# EAGLE board untitled (EAGLE 6.3)
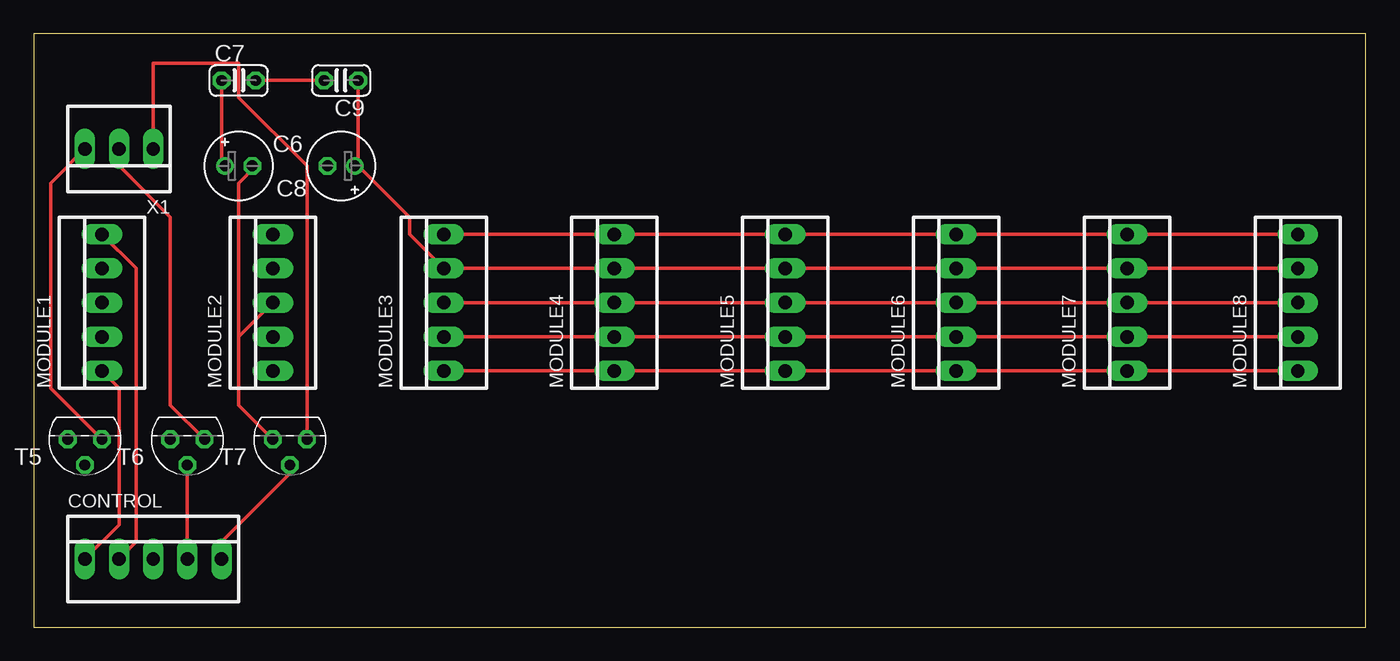
[diagram p0: board, top side]
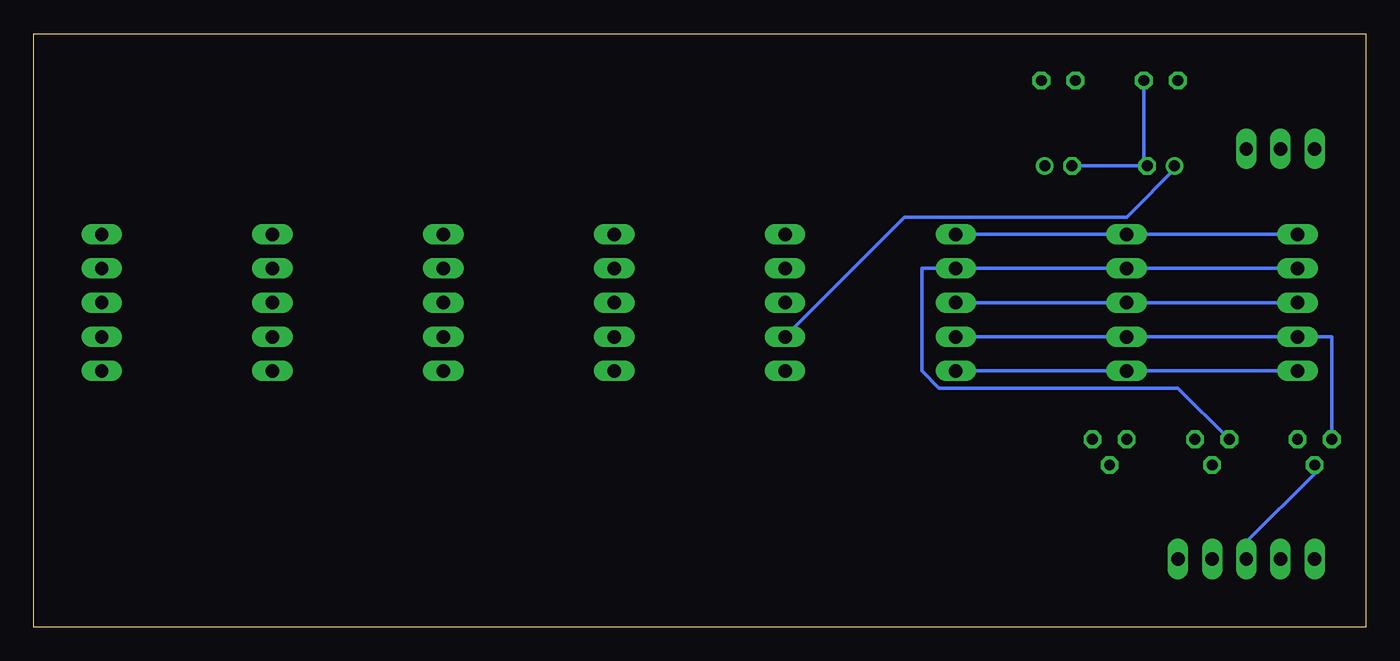
[diagram p1: board, bottom side, seen from below]

Size 99.04 x 44.12 mm. Coordinates in mm from the lower left corner, seen from the top.
Outline: 0,0 99.04,0 99.04,44.12 0,44.12 0,0
Copper layers (1*16): Top 0.035mm / dielectric 1.5mm / Bottom 0.035mm
Design rules "default": minimum track width 10mil, minimum drill 24mil, track to track 8mil, track to pad 8mil, pad to pad 8mil, via to via 8mil, smd to smd 8mil, copper to edge 40mil, drill to drill 8mil, minimum pad ring 10mil, minimum via ring 8mil, stop-mask expansion 4mil, vias tented up to drill 0mil, thermal gap 10mil

## Footprints (pad centres in the part's own frame; a part is rotated, then mirrored left to right if it is on the bottom)
E2-5 = drill 0.813 pad 1.27: + -1.016,0 | drill 0.813 pad 1.27 octagon: - 1.016,0
C025-024X044 = drill 0.813 octagon: 1 -1.27,0; 2 1.27,0
22-23-2051 = drill 1 long: 1 -5.08,0; 2 -2.54,0; 3 0,0; 4 2.54,0; 5 5.08,0
TO92-E1 = drill 0.813 octagon: 1 -1.27,0; 2 0,1.905; 3 1.27,0
22-23-2031 = drill 1 long: 1 -2.54,0; 2 0,0; 3 2.54,0

## Placement (x,y rotation side)
C6  100uF  [E2-5]  15.24,34.29 0 top
C7  0.1uF  [C025-024X044]  15.24,40.64 0 top
C8  100uF  [E2-5]  22.86,34.29 180 top
C9  0.1uF  [C025-024X044]  22.86,40.64 180 top
CONTROL  22-23-2051  [22-23-2051]  8.89,5.08 0 top
MODULE1  22-23-2051  [22-23-2051]  5.08,24.13 90 top
MODULE2  22-23-2051  [22-23-2051]  17.78,24.13 90 top
MODULE3  22-23-2051  [22-23-2051]  30.48,24.13 90 top
MODULE4  22-23-2051  [22-23-2051]  43.18,24.13 90 top
MODULE5  22-23-2051  [22-23-2051]  55.88,24.13 90 top
MODULE6  22-23-2051  [22-23-2051]  68.58,24.13 90 top
MODULE7  22-23-2051  [22-23-2051]  81.28,24.13 90 top
MODULE8  22-23-2051  [22-23-2051]  93.98,24.13 90 top
T5  BJT  [TO92-E1]  3.81,13.97 180 top
T6  BJT  [TO92-E1]  11.43,13.97 180 top
T7  BJT  [TO92-E1]  19.05,13.97 180 top
X1  22-23-2031  [22-23-2031]  6.35,35.56 180 top

## Library data of the parts
C6-C9 = rcl
CONTROL MODULE1-MODULE8 = con-molex; MF: MOLEX; MPN: 22-23-2051; OC_FARNELL: 1462952; OC_NEWARK: 38C9178
T5-T7 = transistor
X1 = con-molex; MF: MOLEX; MPN: 22-23-2031; OC_FARNELL: 1462950; OC_NEWARK: 30C0862

## Nets
3V: C8.+ C9.1 MODULE1.4 MODULE2.4 MODULE3.4 MODULE4.4 MODULE5.4 MODULE6.4 MODULE7.4 MODULE8.4 T6.3
5V: C6.+ C7.1 MODULE1.2 MODULE2.2 MODULE3.2 MODULE4.2 MODULE5.2 MODULE6.2 MODULE7.2 MODULE8.2 T5.3
EN-3V: CONTROL.4 T6.2
EN-5V: CONTROL.3 T5.2
EN-GND: CONTROL.5 T7.2
GND: C6.- C7.2 C8.- C9.2 MODULE1.3 MODULE2.3 MODULE3.3 MODULE4.3 MODULE5.3 MODULE6.3 MODULE7.3 MODULE8.3 T7.3
SCL: CONTROL.2 MODULE1.5 MODULE2.5 MODULE3.5 MODULE4.5 MODULE5.5 MODULE6.5 MODULE7.5 MODULE8.5
SDA: CONTROL.1 MODULE1.1 MODULE2.1 MODULE3.1 MODULE4.1 MODULE5.1 MODULE6.1 MODULE7.1 MODULE8.1
UF-3V: T6.1 X1.2
UF-5V: T5.1 X1.3
UF-GND: T7.1 X1.1

## Tracks (layer width: path | path; a pad name or v marks a point on that pad's centre or on a via)
3V
  Top 0.254: C9.1 24.13,34.29 | MODULE8.4 MODULE7.4 MODULE6.4 MODULE5.4 MODULE4.4 MODULE3.4 27.94,29.21 27.94,30.48 24.13,34.29 | 24.13,34.29 C8.+
  Bottom 0.254: MODULE1.4 MODULE2.4 MODULE3.4 33.02,26.67 33.02,19.05 31.75,17.78 13.97,17.78 T6.3
5V
  Top 0.254: C7.1 13.97,34.29 C6.+ | MODULE3.2 MODULE4.2 MODULE5.2 MODULE6.2 MODULE7.2 MODULE8.2
  Bottom 0.254: T5.3 2.54,21.59 MODULE1.2 MODULE2.2 MODULE3.2 | MODULE4.2 34.29,30.48 17.78,30.48 13.97,34.29 C6.+
EN-3V
  Top 0.254: CONTROL.4 T6.2
EN-5V
  Bottom 0.254: CONTROL.3 8.89,6.35 3.81,11.43 T5.2
EN-GND
  Top 0.254: CONTROL.5 13.97,6.35 19.05,11.43 T7.2
GND
  Top 0.254: C9.2 C7.2 | T7.3 15.24,16.51 15.24,21.59 | MODULE2.3 15.24,21.59 | 15.24,21.59 15.24,33.02 16.51,34.29 C6.- | MODULE3.3 MODULE4.3 MODULE5.3 MODULE6.3 MODULE7.3 MODULE8.3
  Bottom 0.254: C8.- 16.51,34.29 | 16.51,34.29 C7.2 | 16.51,34.29 C6.- | MODULE1.3 MODULE2.3 MODULE3.3
SCL
  Top 0.254: CONTROL.2 7.62,6.35 7.62,26.67 MODULE1.5 | MODULE3.5 MODULE4.5 MODULE5.5 MODULE6.5 MODULE7.5 MODULE8.5
  Bottom 0.254: MODULE1.5 MODULE2.5 MODULE3.5
SDA
  Top 0.254: CONTROL.1 6.35,7.62 6.35,17.78 MODULE1.1 | MODULE3.1 MODULE4.1 MODULE5.1 MODULE6.1 MODULE7.1 MODULE8.1
  Bottom 0.254: MODULE1.1 MODULE2.1 MODULE3.1
UF-3V
  Top 0.254: T6.1 10.16,16.51 10.16,30.48 6.35,34.29 X1.2
UF-5V
  Top 0.254: T5.1 1.27,17.78 1.27,33.02 X1.3
UF-GND
  Top 0.254: T7.1 20.32,34.29 15.24,39.37 15.24,41.91 8.89,41.91 X1.1